# Altium PCB 555_timer.PcbDoc
Units mil, origin at the board's own origin, x right, y up, seen from the top; angles counter-clockwise.
Board outline 3500 x 2000 mil, 2 copper layers (Top Layer, Bottom Layer), stack 61.756 mil thick; 23 components, 12 nets, 61 pads, 9 vias.
Unrouted connection lines stored in the file: 22.
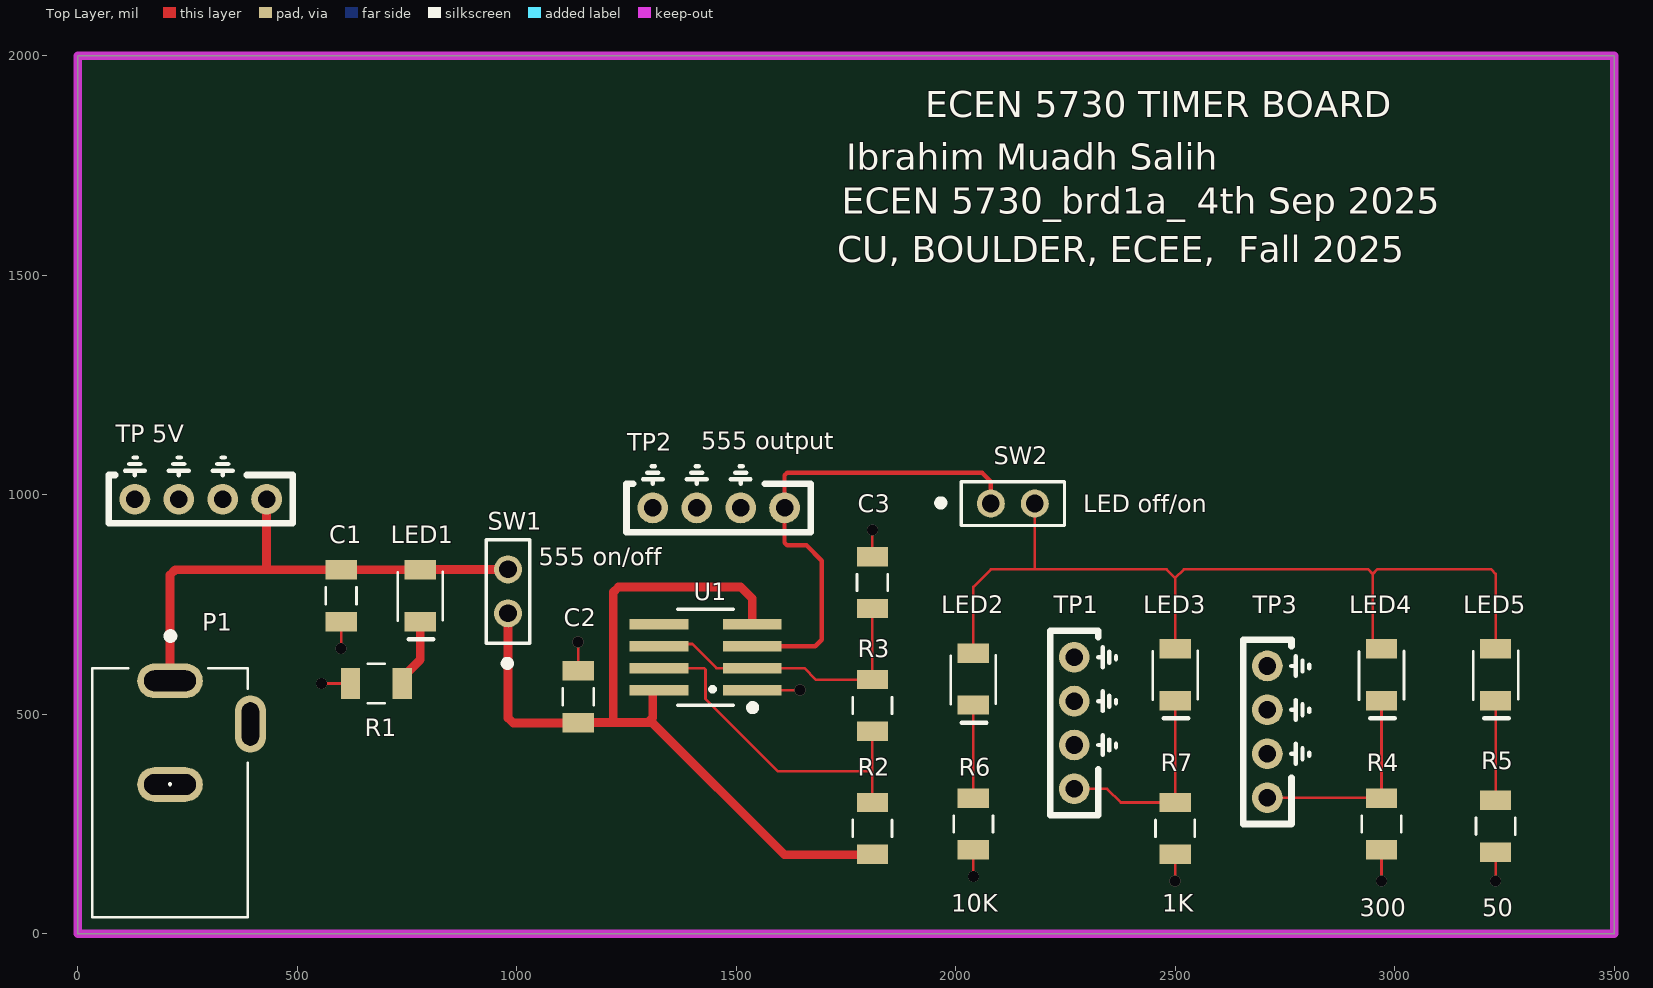
[diagram p0: Top Layer view]
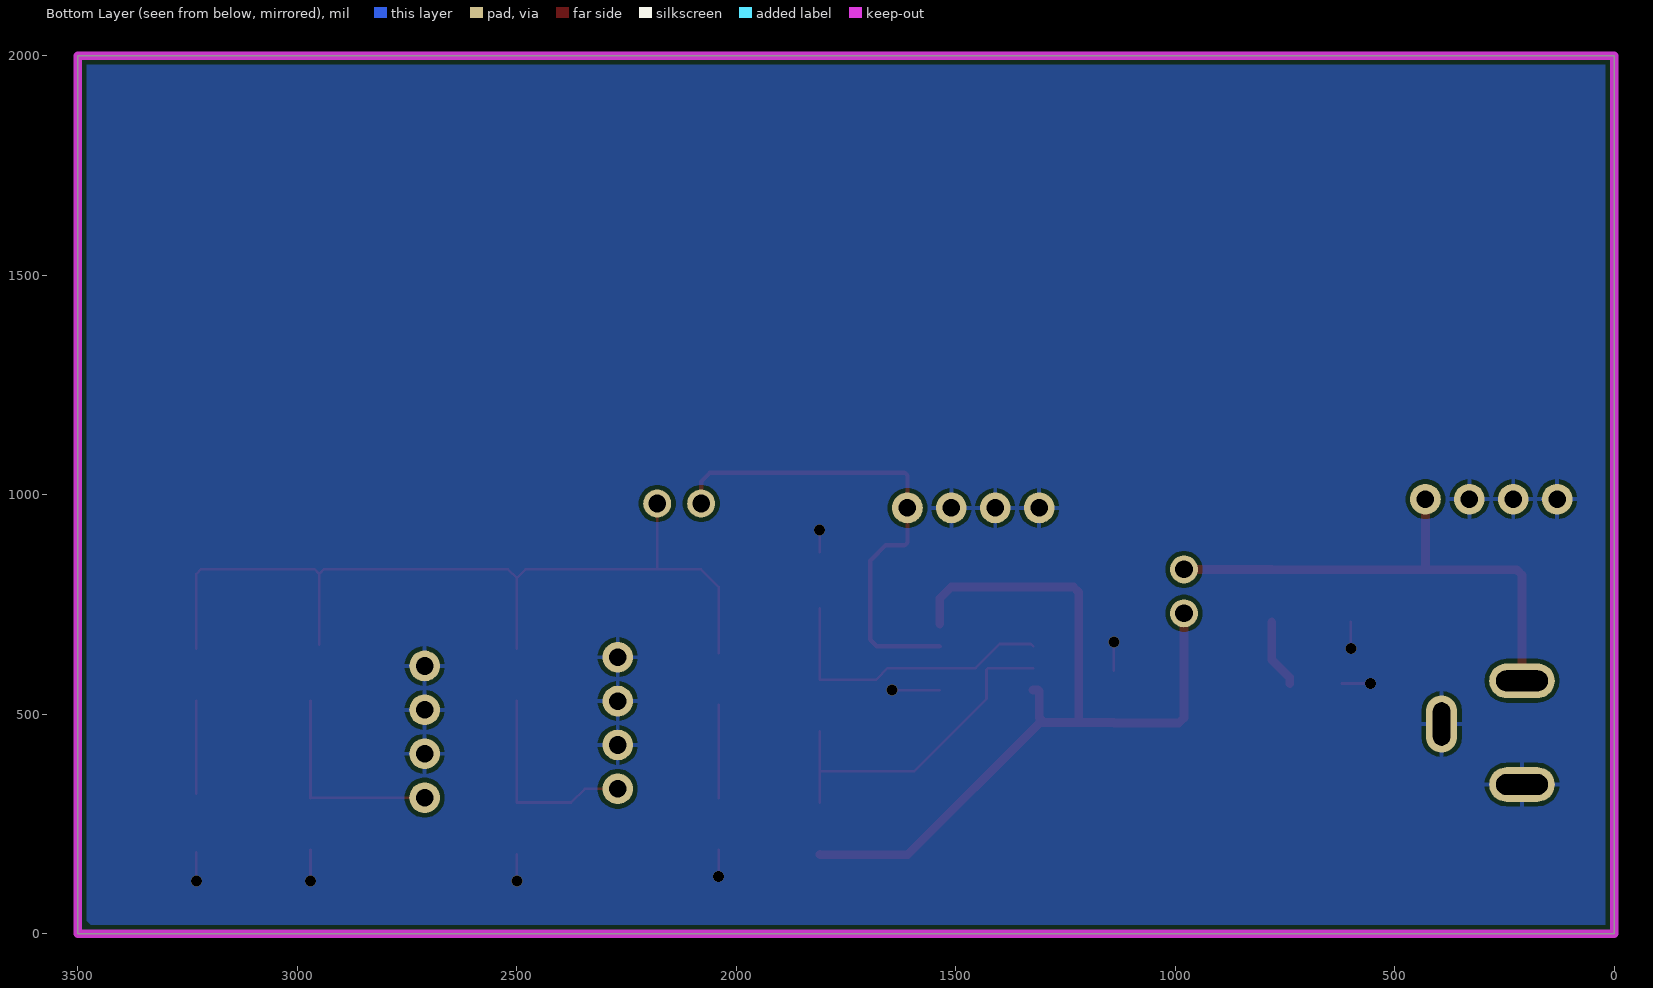
[diagram p1: Bottom Layer view, seen from below]
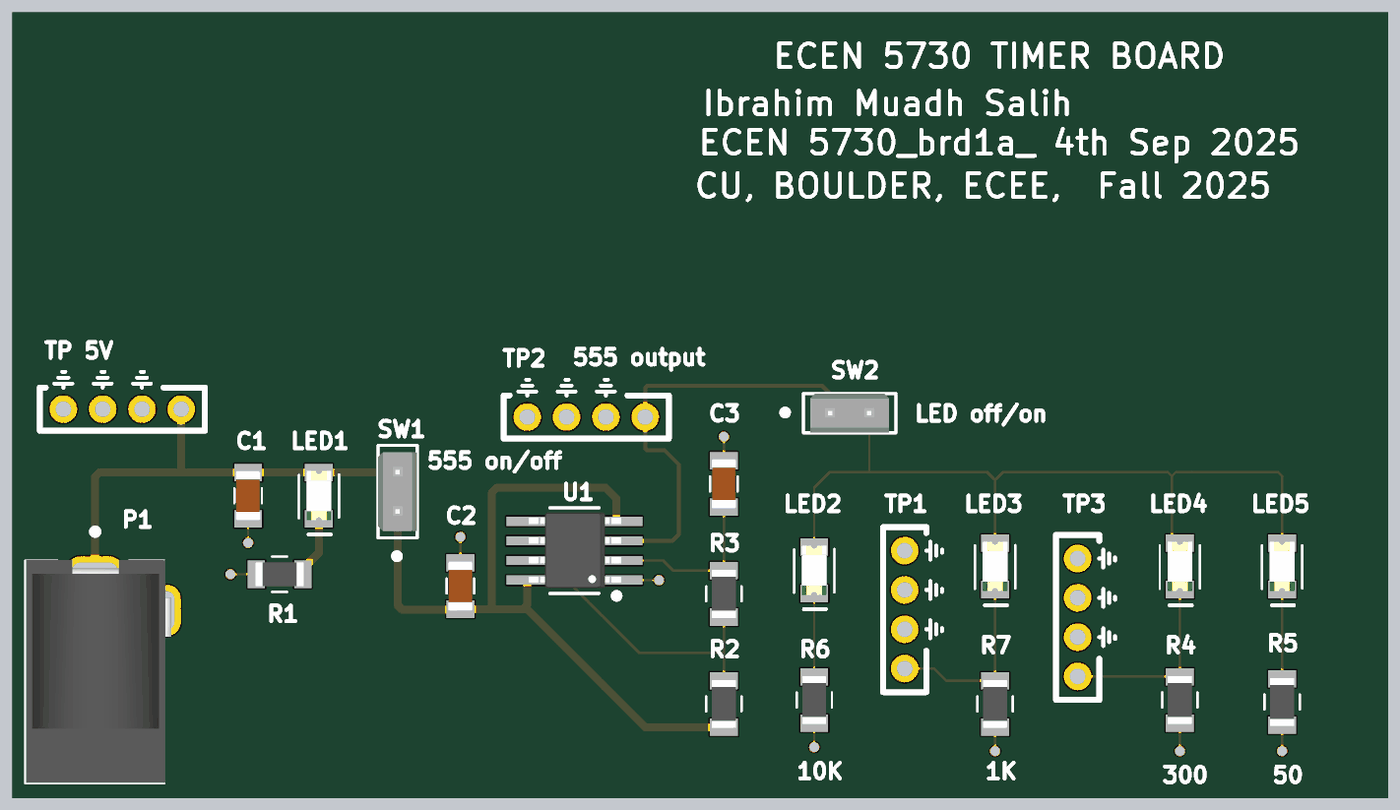
[diagram p2: 3D render of the assembled board from above, using the file's embedded part models]

## Layer stack, top to bottom
Top Solder: solder mask 1, SM-001, Dk 4
Top Layer: signal copper 1.378
Dielectric 1: core 59, Core-043, Dk 4.3
Bottom Layer: signal copper 1.378
Bottom Solder: solder mask 1, SM-001, Dk 4

## Board outline
0,0 3500,0 3500,2000 0,2000

## Design rules (kind name [scope] priority, off if disabled: settings)
BoardOutlineClearance [All] p1: gap=10 ignorepadtopadclearanceinfootprint=FALSE
Clearance [All] p1: gap=10 ignorepadtopadclearanceinfootprint=FALSE
PlaneClearance [All] p1: clearance=10
PlaneConnect [All] p1: planeconnectstyle=Direct reliefexpansion=20 reliefentries=4 reliefconductorwidth=10 reliefairgap=10
PolygonConnect [All] p1: thpad.connectstyle=Relief thpad.reliefconductorwidth=10 thpad.reliefentries=4 thpad.polygonreliefangle="90 Angle" thpad.airgapwidth=10 smdpad.connectstyle=Direct smdpad.reliefconductorwidth=10 smdpad.reliefentries=4 smdpad.polygonreliefangle="90 Angle" smdpad.airgapwidth=10 via.connectstyle=Direct via.reliefconductorwidth=10 via.reliefentries=4 via.polygonreliefangle="90 Angle" via.airgapwidth=10
RoutingVias [All] p1: holewidth=13 width=25 viastyle="Through Hole" minholewidth=13 minwidth=25 maxholewidth=60 maxwidth=80
SolderMaskExpansion [All] p1: expansion=4 istentingtop=FALSE
SupplyNets "Schematic Supply Nets_1" [InNet('+5V')] p1: voltage=0.000
SupplyNets "Schematic Supply Nets" [InNet('GND')] p2: voltage=0.000
UnRoutedNet [All] p1: checkbadconnections=TRUE
Width Width_1 [InNet('555_OUTPUT')] p1: maxlimit=100 minlimit=10 preferedwidth=20 minimp=50.000000 maximp=50.000000 favimp=50.000000
Width [InNet('555_OUTPUT')] p2: maxlimit=100 minlimit=6 preferedwidth=6 minimp=50.000000 maximp=50.000000 favimp=50.000000
27 further rules are at their usual default settings.

## Components (designator, comment, footprint, x,y, rotation, side; value= is the part's Value field where it differs from the comment)
C1 "22uF" 1206_Passive_Capacitor 600,770 r90 top
C2 "22uF" 1206_Passive_Capacitor 1140,540 r270 top
C3 "1uF" 1206_Passive_Capacitor 1810,800 r270 top
LED1 "Red" LED_1206 780,770 r270 top
LED2 "Red" LED_1206 2040,580 r270 top
LED3 "Red" LED_1206 2500,590 r270 top
LED4 "Red" LED_1206 2970,590 r270 top
LED5 "Red" LED_1206 3230,590 r270 top
P1 "Power Jack" Power_Jack 210,576.22 r270 top value="CONN PWR JACK 2X5.5MM SOLDER"
R1 "1k" 1206_Passive_Resitor 680,570 r180 top value="1K Ohm"
R2 "1k" 1206_Passive_Resitor 1810,240 r270 top value="1K Ohm"
R3 "1k" 1206_Passive_Resitor 1810,520 r270 top value="1K Ohm"
R4 "300 Ohm" 1206_Passive_Resitor 2970,250 r90 top value=300Ohm
R5 "100Ohm" 1206_Passive_Resitor 3230,245 r90 top value=50Ohm
R6 "10k" 1206_Passive_Resitor 2040,250 r270 top value=10KOhm
R7 "1k" 1206_Passive_Resitor 2500,240 r90 top value="1K Ohm"
SW1 "SW_2Pin_100mil_Switch" 2Pin-Header-Conn 980,730 r90 top
SW2 "SW_2Pin_100mil_Switch" 2Pin-Header-Conn 2080,980 r0 top
TP1 "10x Probe TP" TP10x_Probe 2270,480 r90 top
TP2 "10x Probe TP" TP10x_Probe 1460,970 r180 top
TP3 "10x Probe TP" TP10x_Probe 2710,460 r90 top
"TP 5V" "10x Probe TP" TP10x_Probe 280,990 r180 top
U1 "LMC555CMX/NOPB" TS555IDTTR 1430,630 r180 top

## Footprints (in the part's own frame and the unit in brackets; to place one, negate y for a bottom-side part, rotate by r counter-clockwise, add the part's x,y. Pads: shape width x height; smd on the part's side, far side on the other; paste and mask are expansions set on the pad)
2Pin-Header-Conn [mm]
  round 1.62 hole 1.02: 1(0,0) 2(2.54,0)
  silkscreen extent -3.03,-1.27 4.26,1.26, body extent -1.27,-1.27 3.81,1.27, height 8.13
1206_Passive_Capacitor [mil]
  rect 44x71 smd: 1(-59,0) 2(59,0)
  silkscreen extent -19,-35 19,35, body extent -63,-31 63,32, height 50
1206_Passive_Resitor [mil]
  rect 44x71 smd: 1(-59,0) 2(59,0)
  silkscreen extent -19,-45 19,45, body extent -61,-31 61,31, height 26
LED_1206 [mil]
  rect 44x71 smd: 1(-59,0) 2(59,0)
  silkscreen extent -54,-51 99,51, body extent -63,-31 63,31, height 28
Power_Jack [mm]
  oval 2x3.8 hole 1.2 slot 3 at 90 deg: 1(0,0) 2(6,0)
  oval 3.3x1.8 hole 1 slot 2.5 at 0 deg: 3(2.5,4.65)
  silkscreen extent -2.79,-4.5 13.68,4.5, body extent -0.76,-4.45 13.64,4.95, height 11.49
TP10x_Probe [mil] "Small Probs footprint"
  round 70 hole 40: 1(-150,0) 2(-50,0) 2(50,0) 2(150,0)
  silkscreen extent -210,-95 210,55
TS555IDTTR [mm] "IC OSC Single Timer 2.7MHz 8SOIC"
  rect 3.4x0.6 smd: 1(-2.7,1.905) 2(-2.7,0.635) 3(-2.7,-0.635) 4(-2.7,-1.905) 5(2.7,-1.905) 6(2.7,-0.635) 7(2.7,0.635) 8(2.7,1.905)
  silkscreen extent -2.85,-2.77 1.6,3.05, body extent -3.03,-2.48 2.96,2.43, height 1.75

## Part data
C1 C2: library part C_22uF_1206, "22uF ±10% 25V X5R 1206 Multilayer Ceramic Capacitors MLCC - SMD/SMT RoHS", LCSC Part#=C12891, MFR Part #=CL31A226KAHNNNE, Datasheet=https://datasheet.lcsc.com/lcsc/1811031514_Samsung-Electro-Mechanics-CL31A226KAHNNNE_C12891.pdf, Type=basic
C3: library part C_1uF_1206, "MULTILAYER CERAMIC CAPACITORS MLCC - SMD/SMT 1UF 50V 1206 ROHS", LCSC Part#=C1848, MFR Part #=CL31B105KBHNNNE, Digikey Link=https://www.digikey.com/product-detail/en/C1206C105M4RACTU/399-8150-1-ND/3471873/?itemSeq=304982366, Type=Basic
LED1 LED2 LED3 LED4 LED5: library part LED_RED_1206, "Red 621~631nm 1206 Light Emitting Diodes (LED) RoHS", LCSC Part#=C93133, MFR Part #=15-21/R6C-FQ1R1B/2T, Datasheet=https://datasheet.lcsc.com/szlcsc/1811151241_Everlight-Elec-15-21-R6C-FQ1R1B-2T_C93133.pdf, Type=Extended
P1: library part "P_Power Jack", "Power Barrel Connector Jack 2.10mm ID (0.083\"), 5.50mm OD (0.217\") Through Hole, Right Angle", LCSC Part#=C136744, MFR Part #=PJ-102A, Digikey Link=https://www.digikey.com/product-detail/en/PJ-102A/CP-102A-ND/275425/?itemSeq=304982367, Type=Extended
R1 R2 R3 R7: library part R_1K_1206, "CHIP RESISTOR - SURFACE MOUNT 1KOHMS ±1% 1/4W 1206 ROHS", LCSC Part#=C4410, MFR Part #=RNCP1206FTD1K00CT, Digikey Link=https://www.digikey.com/product-detail/en/RNCP1206FTD1K00/RNCP1206FTD1K00CT-ND/2240675/?itemSeq=304982373, Type=Basic
R4: library part R_300Ohm_1206, "CHIP RESISTOR - SURFACE MOUNT 300OHMS ±1% 1/4W 1206 ROHS", LCSC Part#=C17887, MFR Part #=1206W4F3000T5E, Datasheet=https://datasheet.lcsc.com/szlcsc/Uniroyal-Elec-1206W4F3000T5E_C17887.pdf, Type=Basic
R5: library part R_100Ohm_1206, "100Ω ±1% 0.25W ±100ppm/℃ 1206 Chip Resistor - Surface Mount RoHS", LCSC Part#=C17901, MFR Part #=1206W4F1000T5E, Datasheet=https://datasheet.lcsc.com/lcsc/2206010145_UNI-ROYAL-Uniroyal-Elec-1206W4F1000T5E_C17901.pdf, Type=Basic
R6: library part R_10KOhm_1206, "10 kOhms ±5% 0.25W, 1/4W Chip Resistor 1206 (3216 Metric) Automotive AEC-Q200 Thick Film", LCSC Part#=C17902, MFR Part #=RMCF1206FT10K0, Digikey Link=https://www.digikey.com/en/products/detail/stackpole-electronics-inc/RMCF1206FT10K0/1759669, Type=Basic
SW1 SW2: "2Pin Header", LCSC Part#=C124375, Type=Extended
TP1 TP2 TP3 "TP 5V": library part TP_10x_Probe, "Test Point 300 mil centers"
U1: library part U_555_Fast, "555 Type, Timer/Oscillator _Single_ IC 3MHz 8-SO", LCSC Part#=C90760, Package=SOIC-8, Digikey Link=https://www.digikey.com/product-detail/en/texas-instruments/LMC555CMX-NOPB/LMC555CMX-NOPBCT-ND/1010550, MFR Part #=LMC555CMX/NOPB, Type=Extended

## Via types
v1: diameter 25, hole 25, Top Layer to Bottom Layer, 9 vias

## Nets (pads, with @x,y where several pads share a name; then routed paths per layer and width w, separated by ;. In a path a pad name is that pad's centre, name@x,y a point inside that pad or via, vN(x,y) a via of type N, cw(c..) or ccw(c..) an arc to the next point about the centre after c; other vN are vias at no path point)
555_OUTPUT: SW2.1 TP2.1 U1.3 | length 1130.8
  Top Layer w10: U1.3 1680,655 1695,670 1695,850 1660,885 1615.86,885 1610,890.86 TP2.1 1610,1044.14 1615.86,1050 2060,1050 2080,1030 SW2.1
+5V: "TP 5V.1" C1.2 LED1.1 P1.1 SW1.2 | length 1177.3
  Top Layer w20: P1.1 210,817.28 221.72,829 430,829 ; 430,990 430,829 ; SW1.2 979.5,829.5 780.5,829.5 LED1.1 C1.2 430,829
GND: "TP 5V.2" C1.1 C2.1 C3.1 P1.2 P1.3 R1.2 R4.1 R5.1 R6.2 R7.1 TP1.2 TP2.2 TP3.2 U1.1 | length 611.7
  Top Layer w6: v1(555,570) R1.2 ; v1(600,650) C1.1 ; C2.1 v1(1140,665) ; U1.1 v1(1645,555) ; C3.1@1810,869 v1(1810,920) ; v1(2040,130) R6.2 ; v1(2500,120) R7.1 ; v1(2970,120) R4.1 ; v1(3230,120) R5.1
NetC2_2: C2.2 R2.2 SW1.1 U1.4 U1.8 | length 1978.5
  Top Layer w20: SW1.1 980,491.72 991.72,480 1139,480 C2.2 1219.14,481 ; U1.8 1311.81,555 1310,553.19 1310,492.72 1298.28,481 ; U1.4 1536.3,763.7 1510,790 1231.72,790 1220,778.28 1220,481.86 1219.14,481 ; R2.2 1809,180 1610,180 1309,481 1298.28,481 ; 1219.14,481 1298.28,481
NetC3_2: C3.2 R3.1 U1.2 U1.6 | length 683.9
  Top Layer w6: U1.6 1328.7,660 1400,660 1455,605 U1.2 1655,605 1681,579 R3.1 C3.2
NetLED1_2: LED1.2 R1.1 | length 158
  Top Layer w20: R1.1 739,583.5 780,624.5 LED1.2
NetLED2_1: LED2.1 LED3.1 LED4.1 LED5.1 SW2.2 | length 2029.6
  Top Layer w6: LED2.1 2040,790 2080,830 2180,830 ; SW2.2 2180,830 ; LED3.1 2500,810 ; LED4.1@2950,659 2950,820 ; LED5.1 3230,820 3220,830 2960,830 2950,820 ; 2180,830 2480,830 2500,810 ; 2500,810 2520,830 2940,830 2950,820
NetLED2_2: LED2.2 R6.1 | length 212
  Top Layer w6: R6.1 LED2.2
NetLED3_2: LED3.2 R7.2 TP1.1 | length 474.8
  Top Layer w6: TP1.1 2345,330 2376,299 R7.2 LED3.2
NetLED4_2: LED4.2 R4.2 TP3.1 | length 482.4
  Top Layer w6: TP3.1 2969,310 R4.2 LED4.2
NetLED5_2: LED5.2 R5.2 | length 212
  Top Layer w6: R5.2@3230,319 LED5.2
NetR2_1: R2.1 R3.2 U1.7 | length 784.6
  Top Layer w6: U1.7 1426.49,605 1430,601.49 1430,535 1595,370 1810,370 ; R2.1 1810,370 ; R3.2 1810,370
pads on no net: U1.5

## Polygon pours and split planes (outlines as drawn)
GND on Bottom Layer "GND_L02_P000" (solid, pour order 0): 20,1980 3480,1980 3480,30 3470,20 20,20

## Keep-outs
Keep-Out Layer:
  the board outline again, w20

## Silkscreen, mask and mechanical layers (free items; w line width, h text height)
Top Overlay:
  text "ECEN 5730 TIMER BOARD" at 1930,1860 h60
  text "Ibrahim Muadh Salih" at 1750,1740 h60
  text "ECEN 5730_brd1a_ 4th Sep 2025" at 1740,1639.99 h60
  text "CU, BOULDER, ECEE,  Fall 2025" at 1730,1529.99 h60
  text "555 output" at 1420,1103.33 h40
  text "LED off/on" at 2290,960 h40
  text "555 on/off" at 1050,840 h40
  text "10K" at 1990,50 h40
  text "1K" at 2470,50 h40
  text "300" at 2920,40 h40
  text "50" at 3200,40 h40